# Allegro board fp_01v3.brd
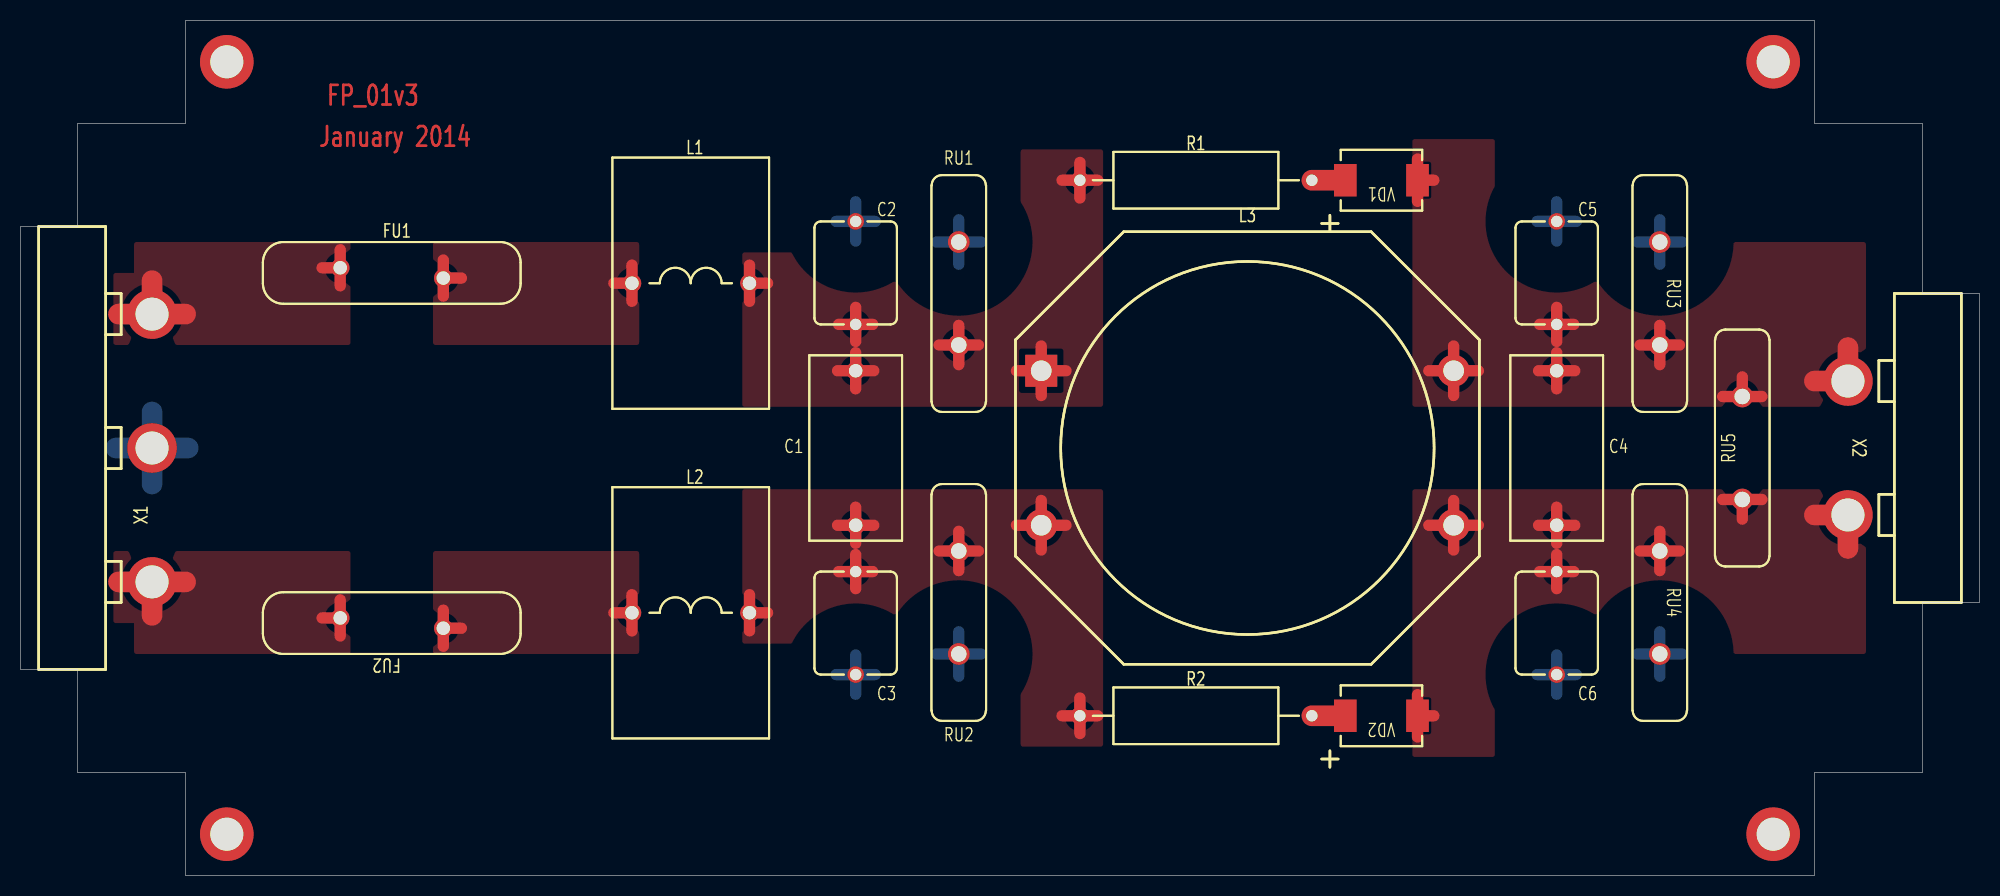
[diagram p0: board, top side]
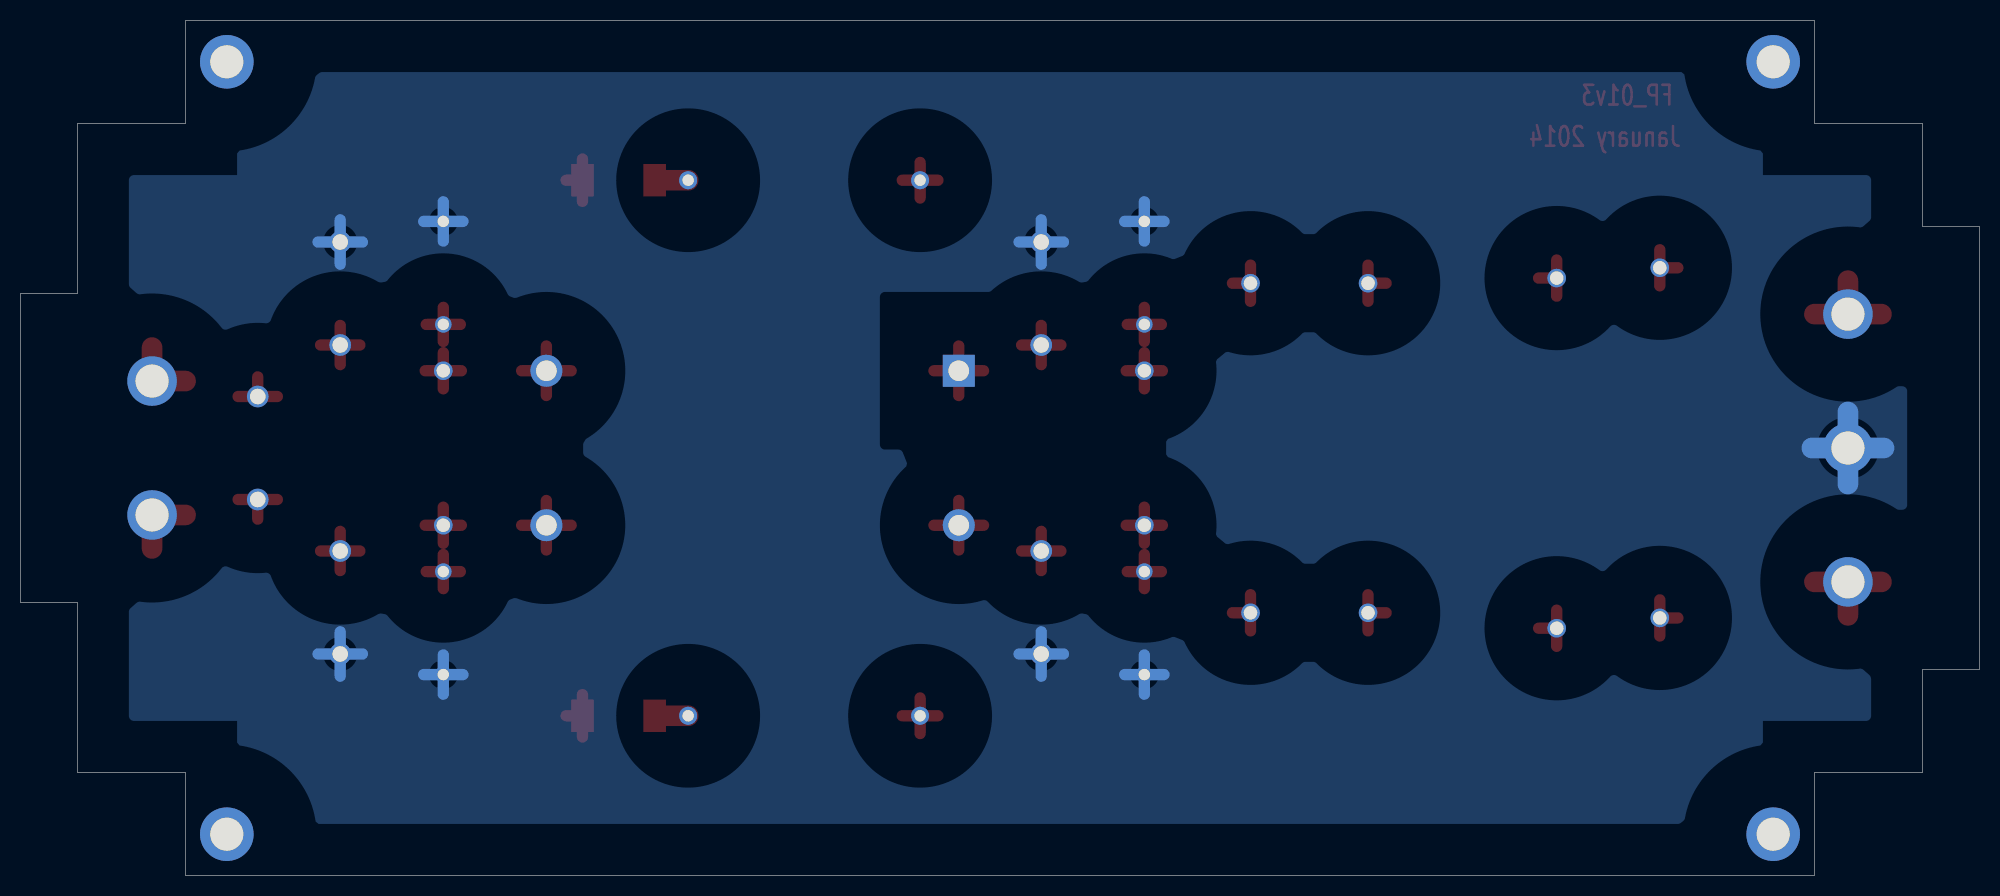
[diagram p1: board, bottom side, seen from below]

Outline 190 x 83 mm; copper layers: TOP, BOTTOM. Coordinates in mm from the lower left corner of the outline.
Outline path: 0,63 0,20 5.5,20 5.5,10 16,10 16,0 174,0 174,10 184.5,10 184.5,26.5 190,26.5 190,56.5 184.5,56.5 184.5,73 174,73 174,83 16,83 16,73 5.5,73 5.5,63 0,63

## Placement (name value [footprint] x y rotation side)
C1  0.47u  [CAPRR1500W80L1800T900H1800USR]  81 41.5 90 top
C2  2200p  [CAPRR1000W62L1000T800H1500USR]  81 58.5 90 top
C3  2200p  [CAPRR1000W62L1000T800H1500USR]  81 24.5 90 top
C4  0.47u  [CAPRR1500W80L1800T900H1800USR]  149 41.5 90 top
C5  2200p  [CAPRR1000W62L1000T800H1500USR]  149 58.5 90 top
C6  2200p  [CAPRR1000W62L1000T800H1500USR]  149 24.5 90 top
FU1  2A  [FUSRR1000W80L2500T600H3500P]  36 58.5 0 top
FU2  2A  [FUSRR1000W80L2500T600H3500P]  36 24.5 180 top
L1  50u  [INDRD1140W90L2450T1520H3500N]  65 57.5 0 top
L2  50u  [INDRD1140W90L2450T1520H3500N]  65 25.5 0 top
L3  B82725A  [FIL_B82725A]  119 41.5 0 top
NOREF  -  [unnamed]  170 79 0 top
NOREF#2  -  [unnamed]  20 4 0 top
NOREF#3  -  [unnamed]  170 4 0 top
NOREF#4  -  [unnamed]  20 79 0 top
R1  56  [RESAD2250W80L1550D500P]  114 67.5 0 top
R2  56  [RESAD2250W80L1550D500P]  114 15.5 0 top
RU1  420  [VARR1000W100L2300T525H2850USR]  91 56.5 270 top
RU2  420  [VARR1000W100L2300T525H2850USR]  91 26.5 270 top
RU3  420  [VARR1000W100L2300T525H2850USR]  159 56.5 270 top
RU4  420  [VARR1000W100L2300T525H2850USR]  159 26.5 270 top
RU5  420  [VARR1000W100L2300T525H2850USR]  167 41.5 90 top
VD1  300B  [DIOM7959X262N]  132 67.5 180 top
VD2  300B  [DIOM7959X262N]  132 15.5 180 top
X1  DG78R  [DEGSON_DG78R_B_03]  12.75 41.5 90 top
X2  DG78R  [DEGSON_DG78R_B_02]  177.25 35 270 top

## Library data of the parts
C1-C6 = CAP_NP
FU1 FU2 = FUSE_LEAD
L1 L2 = INDUCTOR
L3 = B82725A
R1 R2 = RES_2W: alternate symbols: (RESADV500W80L1550D500P)
RU1-RU5 = VAR
VD1 VD2 = DIODE_TVS_BI
X1 = CON_3
X2 = CON_2

## Footprints (pads in the part's own frame, mm; a bottom-side part is the same pattern mirrored in y, then rotated)
CAPRR1000W62L1000T800H1500USR
  round 1.6 hole 1.1: 1(-5,0) 2(5,0)
CAPRR1500W80L1800T900H1800USR
  round 1.8 hole 1.3: 1(-7.5,0) 2(7.5,0)
DEGSON_DG78R_B_02
  round 4.8 hole 3.2: 1(0,0) 2(-13,0)
DEGSON_DG78R_B_03
  round 4.8 hole 3.2: 1(13,0) 2(0,0) 3(-13,0)
DIOM7959X262N
  rect 2.2x3.15 smd: A(3.5,0) C(-3.5,0)
FIL_B82725A
  rect 3.1x3.1 hole 2: 1(-20,7.5)
  round 3.1 hole 2: 2(20,7.5) 3(20,-7.5) 4(-20,-7.5)
FUSRR1000W80L2500T600H3500P
  round 1.8 hole 1.3: 1(-5,0.5) 2(5,-0.5)
INDRD1140W90L2450T1520H3500N
  round 1.8 hole 1.3: 1(-5.7,0) 2(5.7,0)
RESAD2250W80L1550D500P
  round 1.75 hole 1.1: 1(-11.25,0) 2(11.25,0)
unnamed
  round 5.2 hole 3.2: (0,0)
VARR1000W100L2300T525H2850USR
  round 2.1 hole 1.5: 1(-5,0) 2(5,0)

## Nets
1L_IN: C1.2 C2.1 L1.2 L3.1 R1.1 RU1.2
1N_IN: C1.1 C3.2 L2.2 L3.4 R2.1 RU2.1
L_IN: FU1.1 X1.1
L_OUT: C4.2 C5.1 L3.2 RU3.2 RU5.2 VD1.C X2.2
N_IN: FU2.2 X1.3
N_OUT: C4.1 C6.2 L3.3 RU4.1 RU5.1 VD2.C X2.1
PE: C2.2 C3.1 C5.2 C6.1 RU1.1 RU2.2 RU3.1 RU4.2 X1.2
N56496: FU1.2 L1.1
N57870: FU2.1 L2.1
N63608: R2.2 VD2.A
N63612: R1.2 VD1.A

## Routing (per net, layer and track width the routed paths; a pad name or vN(x,y) marks a point on that pad's centre or on a via; arc(x,y) is an arc through that point)
1L_IN: length 43
  TOP w1.1: 79.25,49 C1.2 ; C1.2 81,47.25 ; C1.2 82.75,49 ; C1.2 81,50.75 ; RU1.2 91,53.4 ; RU1.2 91,49.6 ; RU1.2 92.9,51.5 ; RU1.2 89.1,51.5 ; 96.6,49 L3.1 ; L3.1 99,46.6 ; L3.1 99,51.4 ; L3.1 101.4,49 ; L1.2 70.7,59.25 ; L1.2 72.45,57.5 ; L1.2 70.7,55.75 ; 102.75,65.77 R1.1 ; R1.1 102.75,69.23 ; R1.1 104.48,67.5 ; R1.1 101.02,67.5 ; C2.1 81,55.15 ; C2.1 82.65,53.5 ; C2.1 81,51.85 ; C2.1 79.35,53.5
1N_IN: length 43
  TOP w1.1: C1.1 81,35.75 ; C1.1 81,32.25 ; C1.1 82.75,34 ; C1.1 79.25,34 ; L2.2 70.7,27.25 ; L2.2 70.7,23.75 ; L2.2 72.45,25.5 ; 89.1,31.5 RU2.1 ; RU2.1 91,33.4 ; RU2.1 91,29.6 ; RU2.1 92.9,31.5 ; R2.1 104.48,15.5 ; R2.1 102.75,13.77 ; R2.1 102.75,17.23 ; R2.1 101.02,15.5 ; 99,31.6 L3.4 ; L3.4 101.4,34 ; L3.4 96.6,34 ; L3.4 99,36.4 ; 79.35,29.5 C3.2 ; C3.2 81,27.85 ; C3.2 82.65,29.5 ; C3.2 81,31.15
L_IN: length 15
  TOP w1.1: FU1.1 31,60.75 ; FU1.1 29.25,59 ; FU1.1 31,57.25
  TOP w2: 9.5,54.5 X1.1 ; X1.1 12.75,57.75 ; X1.1 16,54.5
L_OUT: length 48.7
  TOP w1.1: RU5.2 167,48.4 ; RU5.2 165.1,46.5 ; RU5.2 168.9,46.5 ; RU3.2 159,53.4 ; RU3.2 157.1,51.5 ; RU3.2 160.9,51.5 ; RU3.2 159,49.6 ; 139,46.6 L3.2 ; L3.2 139,51.4 ; L3.2 136.6,49 ; L3.2 141.4,49 ; 135.5,65.45 VD1.C ; VD1.C 135.5,69.55 ; VD1.C 137.08,67.5 ; C4.2 149,50.75 ; C4.2 150.75,49 ; C4.2 149,47.25 ; C4.2 147.25,49 ; C5.1 150.65,53.5 ; C5.1 147.35,53.5 ; C5.1 149,51.85 ; C5.1 149,55.15
  TOP w2: 174,48 X2.2 177.25,51.25
N_IN: length 15
  TOP w1.1: 31,23.25 FU2.2 ; FU2.2 31,26.75 ; FU2.2 29.25,25
  TOP w2: X1.3 16,28.5 ; X1.3 9.5,28.5 ; X1.3 12.75,25.25
N_OUT: length 48.7
  TOP w1.1: 165.1,36.5 RU5.1 ; RU5.1 167,34.6 ; RU5.1 168.9,36.5 ; L3.3 141.4,34 ; L3.3 139,31.6 ; L3.3 136.6,34 ; L3.3 139,36.4 ; 149,32.25 C4.1 ; C4.1 147.25,34 ; C4.1 149,35.75 ; C4.1 150.75,34 ; RU4.1 160.9,31.5 ; RU4.1 157.1,31.5 ; RU4.1 159,33.4 ; RU4.1 159,29.6 ; C6.2 149,31.15 ; C6.2 150.65,29.5 ; C6.2 149,27.85 ; C6.2 147.35,29.5 ; 135.5,13.45 VD2.C ; VD2.C 135.5,17.55 ; VD2.C 137.08,15.5
  TOP w2: 177.25,31.75 X2.1 174,35
PE: length 78.9
  BOTTOM w1.1: RU4.2 161.15,21.5 ; RU4.2 156.85,21.5 ; RU4.2 159,19.35 ; RU4.2 159,23.65 ; 88.85,21.5 RU2.2 ; RU2.2 91,23.65 ; RU2.2 93.15,21.5 ; RU2.2 91,19.35 ; 159,59.35 RU3.1 ; RU3.1 156.85,61.5 ; RU3.1 161.15,61.5 ; RU3.1 159,63.65 ; 81,61.6 C2.2 ; C2.2 82.9,63.5 ; C2.2 81,65.4 ; C2.2 79.1,63.5 ; RU1.1 91,63.65 ; RU1.1 91,59.35 ; RU1.1 93.15,61.5 ; RU1.1 88.85,61.5 ; C3.1 81,21.4 ; C3.1 82.9,19.5 ; C3.1 81,17.6 ; C3.1 79.1,19.5 ; 147.1,63.5 C5.2 ; C5.2 149,65.4 ; C5.2 149,61.6 ; C5.2 150.9,63.5 ; C6.1 149,21.4 ; C6.1 147.1,19.5 ; C6.1 149,17.6 ; C6.1 150.9,19.5
  BOTTOM w2: 9.25,41.5 X1.2 ; X1.2 12.75,38 ; X1.2 12.75,45 ; X1.2 16.25,41.5
N56496: length 10.5
  TOP w1.1: 57.55,57.5 L1.1 ; L1.1 59.3,55.75 ; L1.1 59.3,59.25 ; FU1.2 42.75,58 ; FU1.2 41,59.75 ; FU1.2 41,56.25
N57870: length 10.5
  TOP w1.1: 41,22.25 FU2.1 ; FU2.1 41,25.75 ; FU2.1 42.75,24 ; 59.3,23.75 L2.1 ; L2.1 59.3,27.25 ; L2.1 57.55,25.5
N63608: length 3.2
  TOP w2: VD2.A R2.2
N63612: length 3.2
  TOP w2: VD1.A R1.2

## Copper pours and planes (outline as drawn; the poured copper is in the pictures)
1L_IN on TOP: 70,60.5 70,45.5 105,45.5 105,70.5 97,70.5 97,60.5
1N_IN on TOP: 70,37.5 105,37.5 105,12.5 97,12.5 97,22.5 70,22.5
L_IN on TOP: 9,58.5 9,51.5 32,51.5 32,61.5 11,61.5 11,58.5
L_OUT on TOP: 179,61.5 179,45.5 135,45.5 135,71.5 143,71.5 143,63.5 155,63.5 155,61.5
N_IN on TOP: 9,24.5 9,31.5 32,31.5 32,21.5 11,21.5 11,24.5
N_OUT on TOP: 179,37.5 135,37.5 135,11.5 143,11.5 143,19.5 155,19.5 155,21.5 179,21.5
PE on BOTTOM: 21,15 10.5,15 10.5,25 10,25.5 10,35.5 7,35.5 7,47.5 10,47.5 10,57.5 10.5,58 10.5,68 21,68 21,78 169,78 169,68 179.5,68 179.5,51.5 180,51.5 180,31.5 179.5,31.5 179.5,15 169,15 169,5 21,5
N56496 on TOP: 40,51.5 40,61.5 60,61.5 60,51.5
N57870 on TOP: 40,31.5 40,21.5 60,21.5 60,31.5

## Text on the board
TOP: January 2014 | FP_01v3
User.6: FIGURE | SIZE | 1.0 | 1.1 | 1.3 | 1.5 | 2.0 | 3.2 | DRILL CHART: TOP to BOTTOM | ALL UNITS ARE IN MILLIMETERS | PLATED | QTY | 4 | 8 | 12 | 10 | 5
